# Altium PCB PIPOCPUG_2006.PCBDOC (part 1 of 6)
Units mil, origin at the board's own origin, x right, y up, seen from the top; angles counter-clockwise.
Board outline 8500 x 4525 mil, 2 copper layers (Top Layer, Top, Bottom Layer, Bottom); 346 components, 259 nets, 1117 pads, 618 vias.
Unrouted connection lines stored in the file: 782.
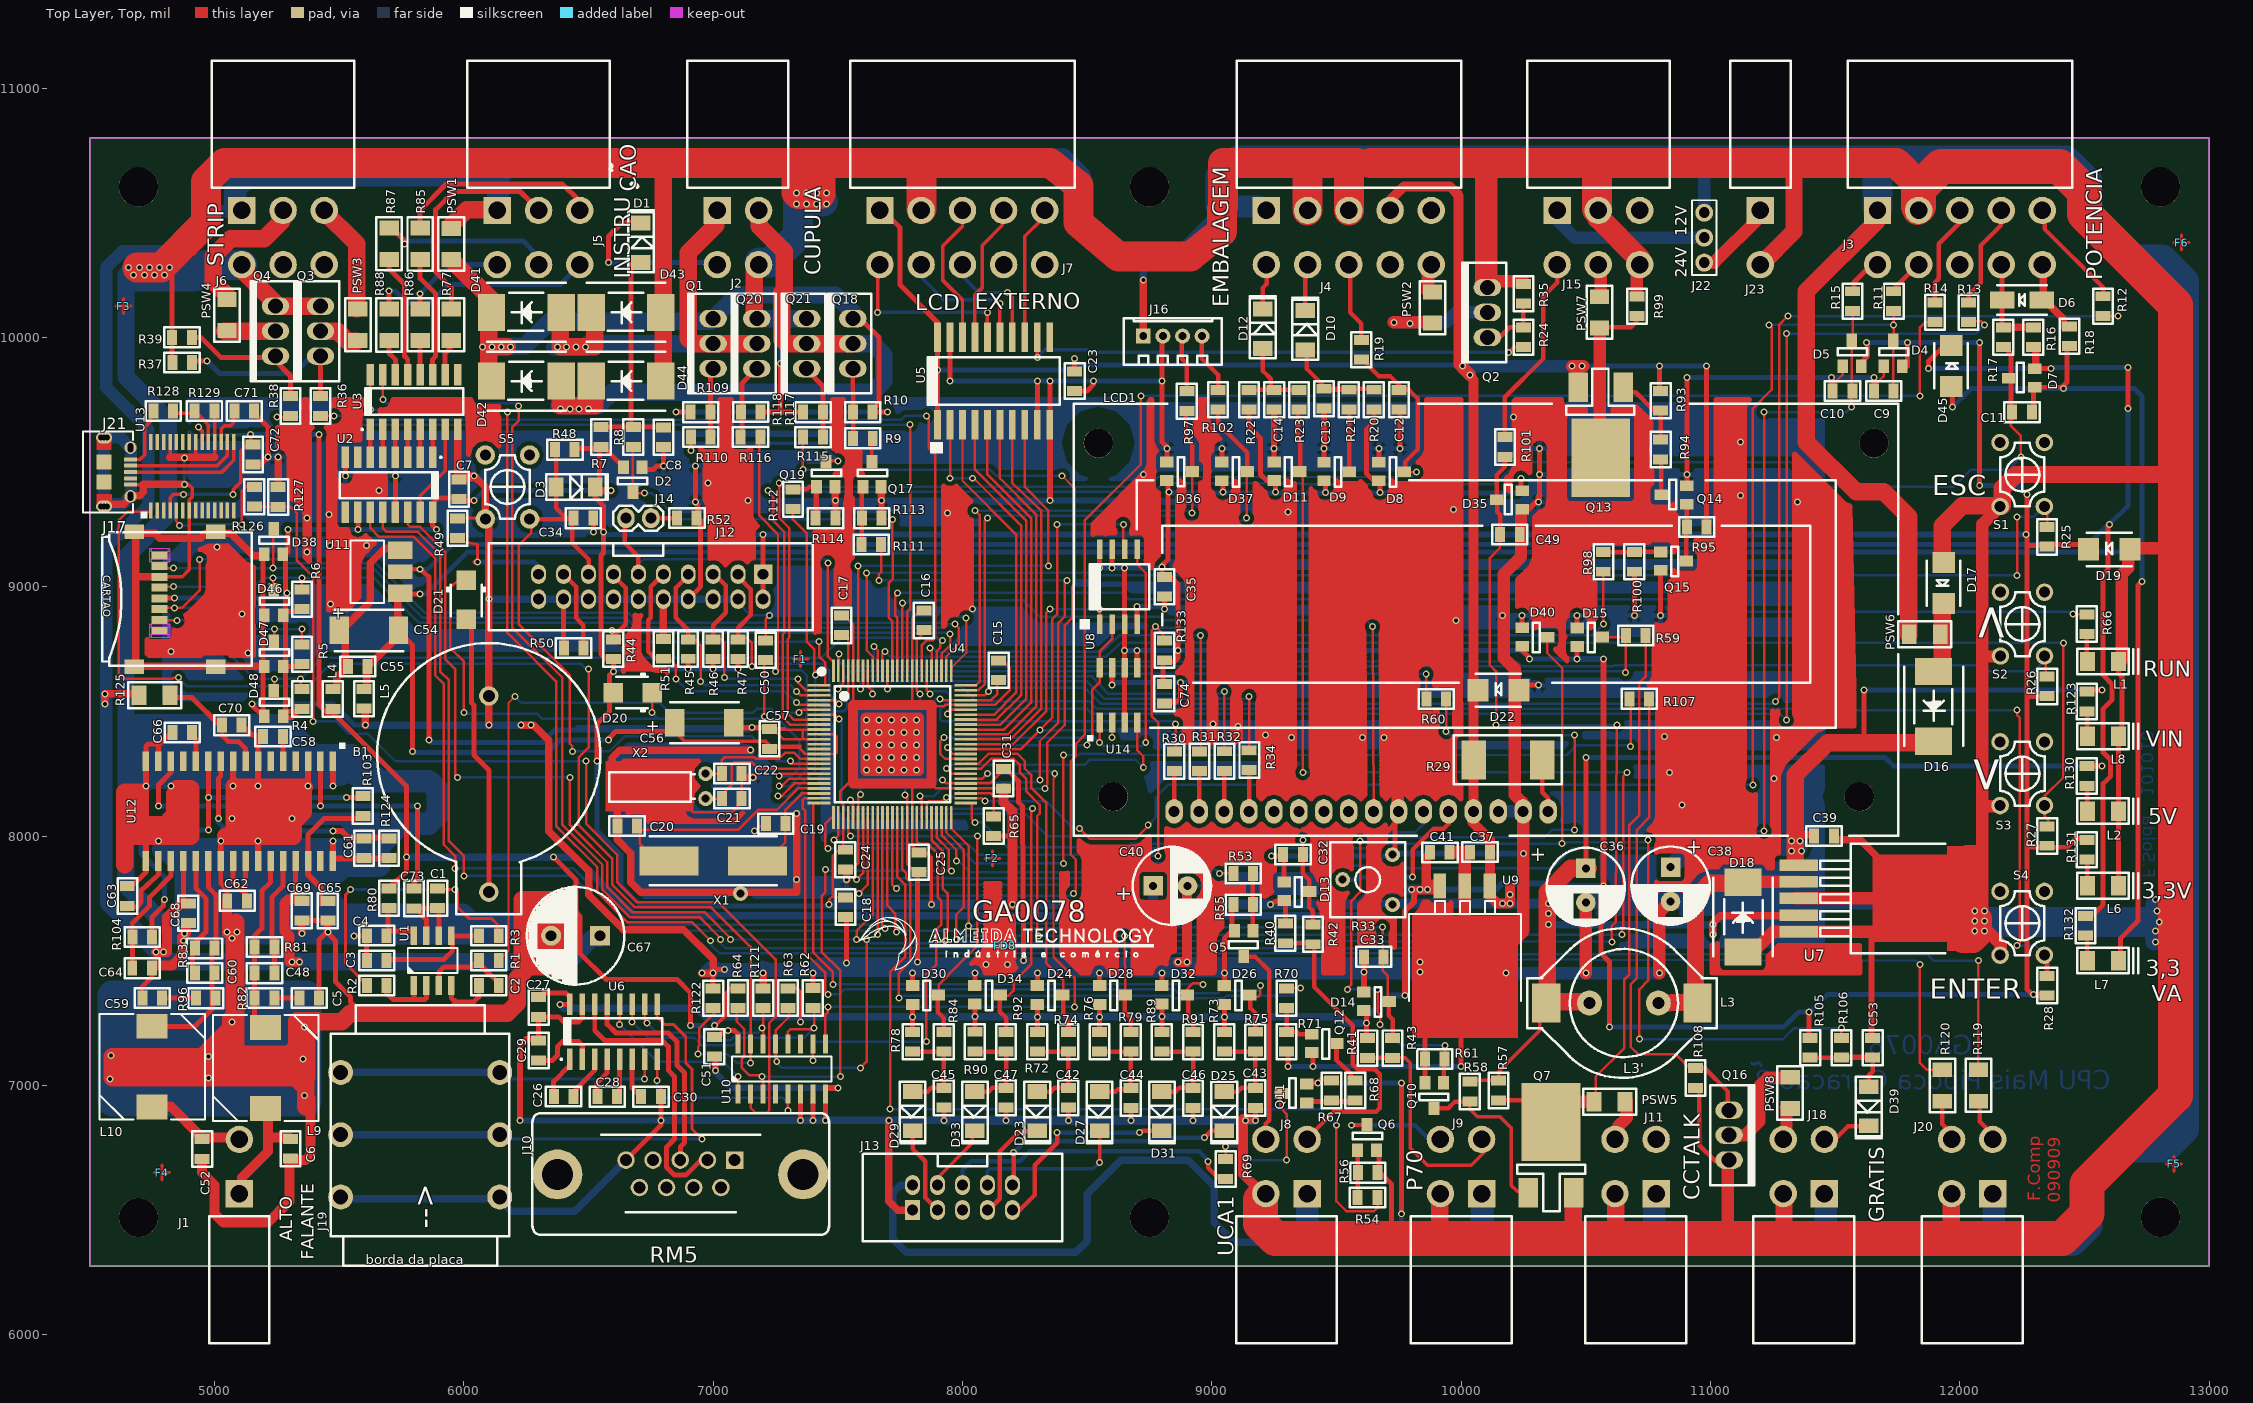
[diagram p0: Top Layer, Top view]
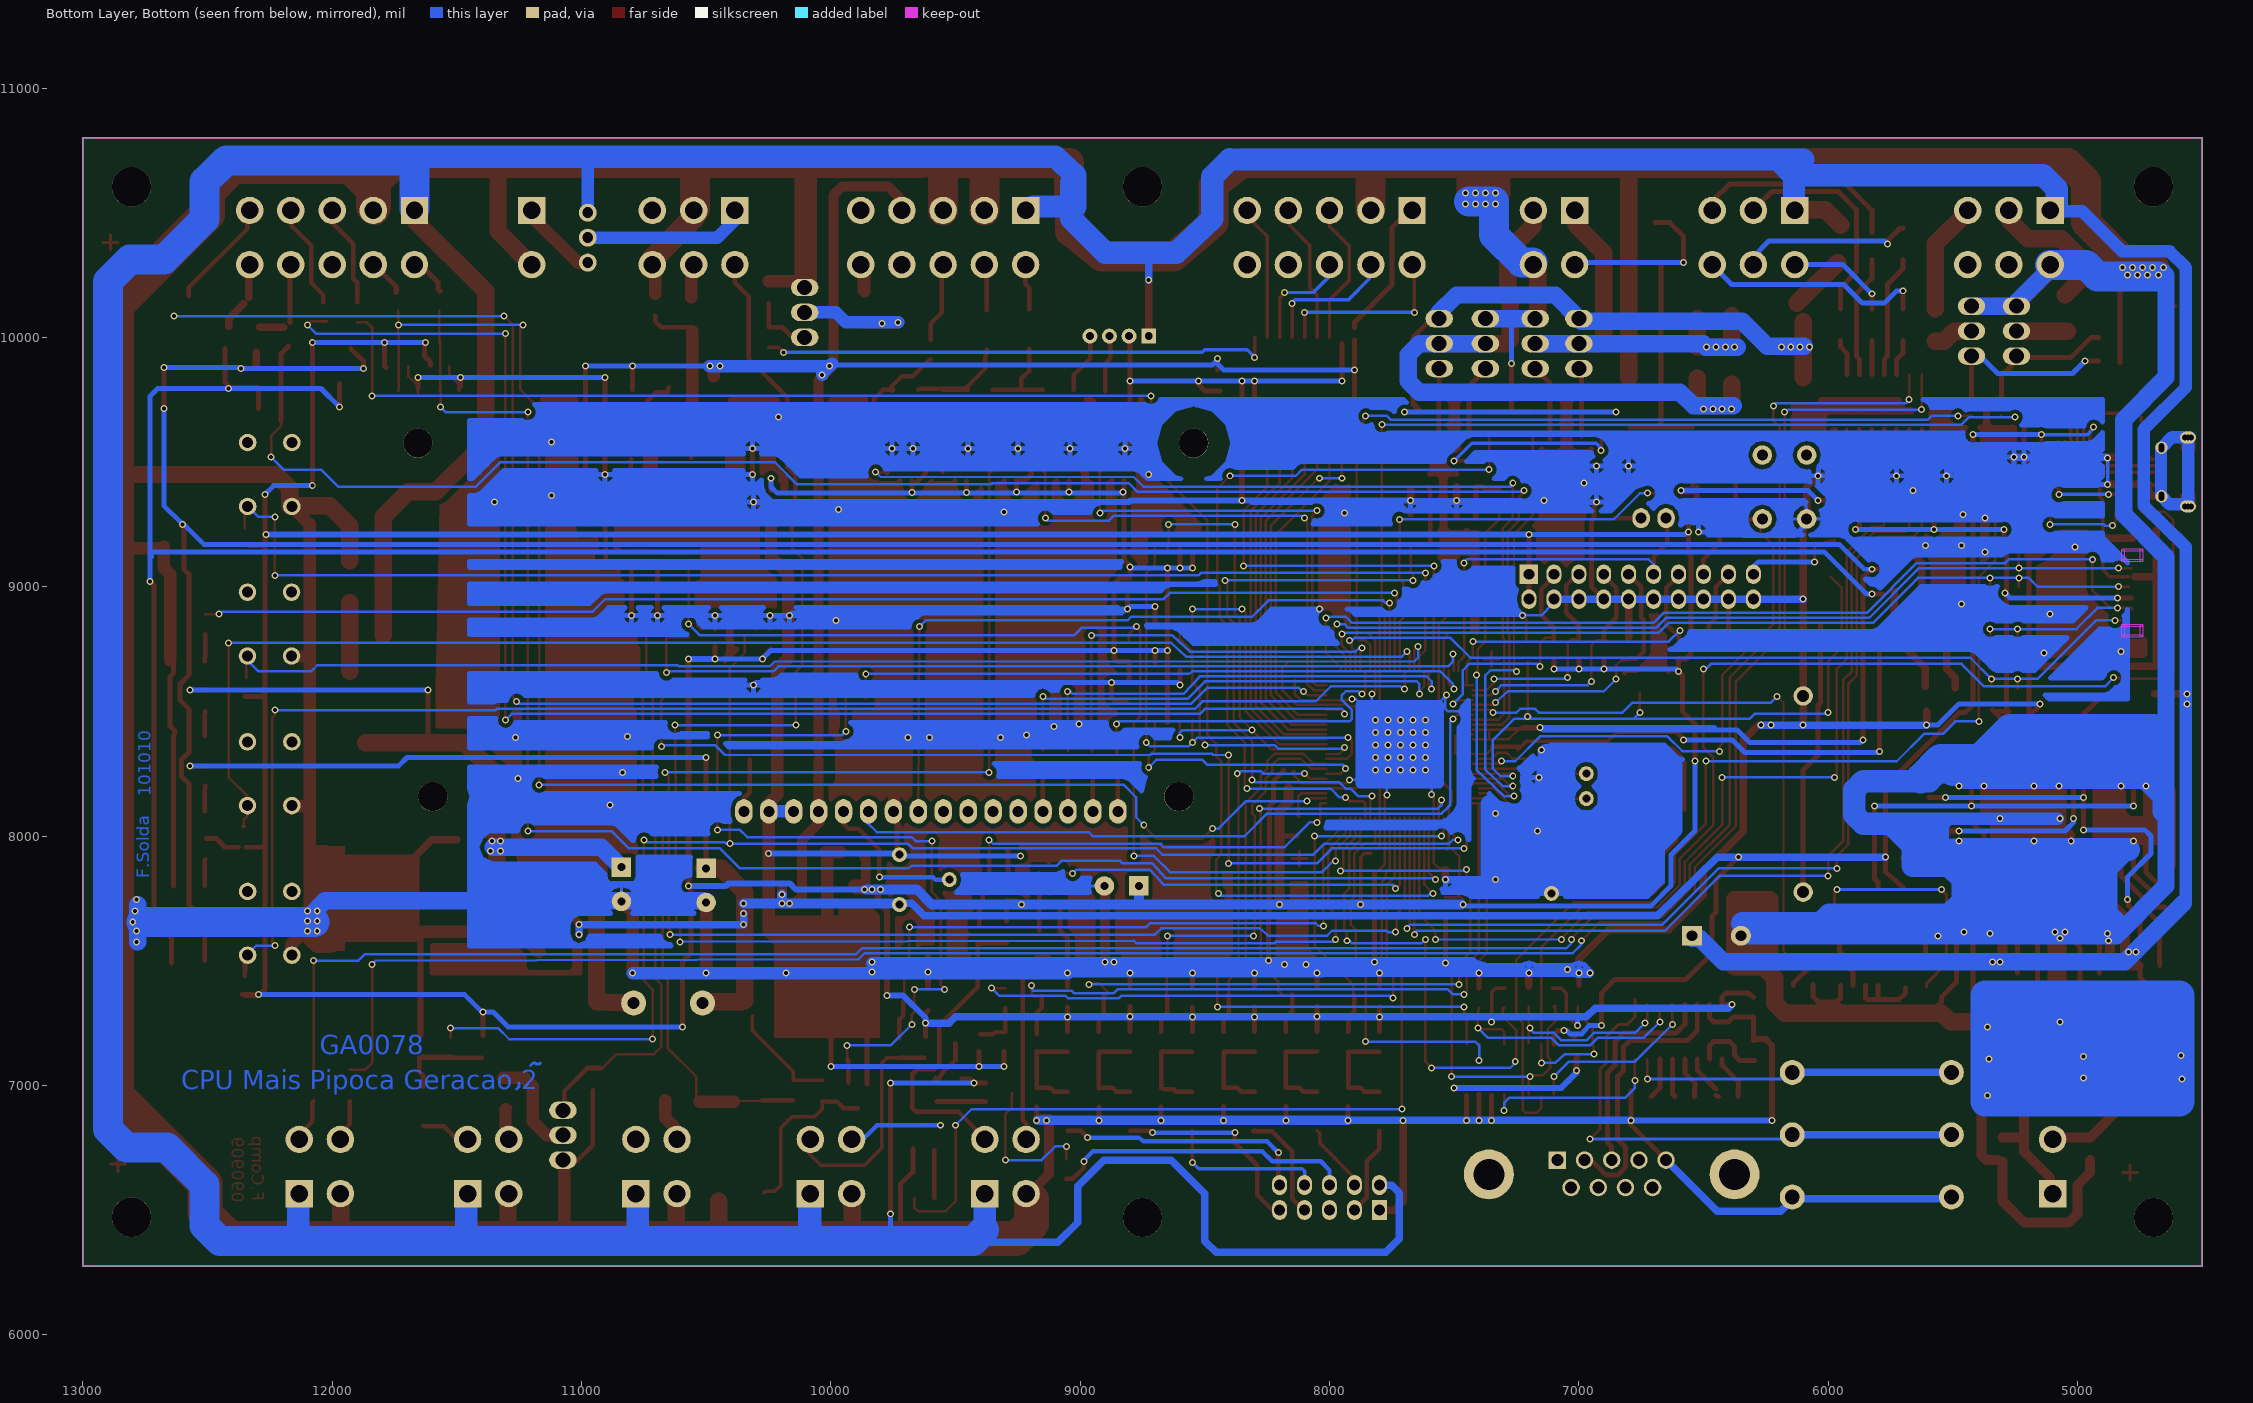
[diagram p1: Bottom Layer, Bottom view, seen from below]

## Layer stack, top to bottom
Top Layer, Top: signal copper 1.4
Dielectric: dielectric 12.6, FR-4, Dk 4.8
Bottom Layer, Bottom: signal copper 1.4

## Board outline
13000,6275 13000,10800 4500,10800 4500,6275

## Design rules (kind name [scope] priority, off if disabled: settings)
Clearance "Clearance_Top Layer, Top_PadToPad" [ExistsOnLayer('Top Layer, Top') And IsPad vs ExistsOnLayer('Top Layer, Top') And IsPad] p1: gap=12
Clearance "Clearance_Top Layer, Top_PadToLine" [ExistsOnLayer('Top Layer, Top') And IsPad vs ExistsOnLayer('Top Layer, Top') And IsWire] p2: gap=12
Clearance "Clearance_Top Layer, Top_LineToLine" [ExistsOnLayer('Top Layer, Top') And IsWire vs ExistsOnLayer('Top Layer, Top') And IsWire] p3: gap=12
Clearance "Clearance_Top Layer, Top_ViaToPad" [ExistsOnLayer('Top Layer, Top') And IsVia vs ExistsOnLayer('Top Layer, Top') And IsPad] p4: gap=12
Clearance "Clearance_Top Layer, Top_ViaToLine" [ExistsOnLayer('Top Layer, Top') And IsVia vs ExistsOnLayer('Top Layer, Top') And IsWire] p5: gap=12
Clearance "Clearance_Top Layer, Top_ViaToVia" [ExistsOnLayer('Top Layer, Top') And IsVia vs ExistsOnLayer('Top Layer, Top') And IsVia] p6: gap=12
Clearance "Clearance_Bottom Layer, Bottom_PadToPad" [ExistsOnLayer('Bottom Layer, Bottom') And IsPad vs ExistsOnLayer('Bottom Layer, Bottom') And IsPad] p7: gap=12
Clearance "Clearance_Bottom Layer, Bottom_PadToLine" [ExistsOnLayer('Bottom Layer, Bottom') And IsPad vs ExistsOnLayer('Bottom Layer, Bottom') And IsWire] p8: gap=12
Clearance "Clearance_Bottom Layer, Bottom_LineToLine" [ExistsOnLayer('Bottom Layer, Bottom') And IsWire vs ExistsOnLayer('Bottom Layer, Bottom') And IsWire] p9: gap=12
Clearance "Clearance_Bottom Layer, Bottom_ViaToPad" [ExistsOnLayer('Bottom Layer, Bottom') And IsVia vs ExistsOnLayer('Bottom Layer, Bottom') And IsPad] p10: gap=12
Clearance "Clearance_Bottom Layer, Bottom_ViaToLine" [ExistsOnLayer('Bottom Layer, Bottom') And IsVia vs ExistsOnLayer('Bottom Layer, Bottom') And IsWire] p11: gap=12
Clearance "Clearance_Bottom Layer, Bottom_ViaToVia" [ExistsOnLayer('Bottom Layer, Bottom') And IsVia vs ExistsOnLayer('Bottom Layer, Bottom') And IsVia] p12: gap=12
Clearance Clearance_Design_HoleToHole [(IsVia Or IsThruPin) vs (IsVia Or IsThruPin)] p13: gap=13
Clearance [All] p14: gap=12
PlaneClearance [All] p1: clearance=10
PolygonConnect [All] p1: connectstyle=Relief reliefconductorwidth=10 reliefentries=4 polygonreliefangle="90 Angle"
RoutingVias [All] p1: holewidth=28 width=50 viastyle="Through Hole" minholewidth=28 minwidth=50 maxholewidth=28 maxwidth=50
SilkscreenOverComponentPads [All] p1: minsilkscreentomaskgap=10
SolderMaskExpansion [All] p1: expansion=4
Width [All] p1: maxlimit=10 minlimit=10 preferedwidth=10
26 further rules are at their usual default settings.

## Components (designator, comment, footprint, x,y, rotation, side; value= is the part's Value field where it differs from the comment)
B1 "" "SUPORTE PILHA C" 6100,7775 r0 top
C1 "100nF/50V-0805" "0805-REVISADO O"#1 5895,7750 r0 top
C2 "100nF/50V-0805" "0805-REVISADO O"#2 6100,7400 r0 top
C3 "100nF/50V-0805" "0805-REVISADO O"#2 5650,7500 r0 top
C4 "100nF/50V-0805" "0805-REVISADO O"#2 5650,7600 r0 top
C5 "100nF/50V-0805" "0805-REVISADO O"#3 5380,7350 r0 top
C6 "100nF/50V-0805" "0805-REVISADO O"#1 5305,6745 r0 top
C7 "100nF/50V-0805" "0805-REVISADO O"#4 5980,9390 r0 top
C8 "100nF/50V-0805" "0805-REVISADO O"#5 6800,9600 r0 top
C9 "100nF/50V-0805" "0805-REVISADO O"#6 11695,9785 r0 top
C10 "22pF/50V-0805" "0805-REVISADO O"#3 11530,9785 r0 top
C11 "100nF/50V-0805" "0805-REVISADO O"#3 12250,9700 r0 top
C12 "100nF/50V-0805" "0805-REVISADO O"#5 9750,9750 r0 top
C13 "100nF/50V-0805" "0805-REVISADO O"#5 9450,9755 r0 top
C14 "100nF/50V-0805" "0805-REVISADO O"#5 9250,9750 r0 top
C15 "100nF/50V-0805" "0805-REVISADO O"#5 8145,8665 r0 top
C16 "100nF/50V-0805" "0805-REVISADO O"#1 7845,8865 r0 top
C17 "100nF/50V-0805" "0805-REVISADO O"#1 7515,8845 r0 top
C18 "100nF/50V-0805" "0805-REVISADO O"#7 7530,7715 r0 top
C19 "22pF/50V-0805" "0805-REVISADO O"#2 7250,8050 r0 top
C20 "22pF/50V-0805" "0805-REVISADO O"#8 6655,8040 r0 top
C21 "22pF/50V-0805" "0805-REVISADO O"#3 7075,8150 r0 top
C22 "22pF/50V-0805" "0805-REVISADO O"#3 7075,8250 r0 top
C23 "100nF/50V-0805" "0805-REVISADO O"#5 8450,9825 r0 top
C24 "100nF/50V-0805" "0805-REVISADO O"#1 7530,7905 r0 top
C25 "100nF/50V-0805" "0805-REVISADO O"#5 7825,7895 r0 top
C26 "100nF/50V-0805" "0805-REVISADO O"#9 6400,6955 r0 top
C27 "100nF/50V-0805" "0805-REVISADO O"#5 6300,7315 r0 top
C28 "100nF/50V-0805" "0805-REVISADO O"#6 6575,6955 r0 top
C29 "100nF/50V-0805" "0805-REVISADO O"#10 6300,7140 r0 top
C30 "100nF/50V-0805" "0805-REVISADO O"#6 6750,6955 r0 top
C31 "100nF/50V-0805" "0805-REVISADO O"#11 8165,8230 r0 top
C32 "100nF/50V-0805" "0805-REVISADO O"#2 9325,7925 r0 top
C33 "100nF/50V-0805" "0805-REVISADO O"#12 9650,7515 r0 top
C34 "100nF/50V-0805" "0805-REVISADO O"#3 6480,9275 r0 top
C35 "100nF/50V-0805" "0805-REVISADO O"#5 8810,9000 r0 top
C36 "100uF/35V" "CAP POL 8X12MM"#1 10500,7870 r0 top
C37 "100nF/50V-0805" "0805-REVISADO O"#2 10075,7935 r0 top
C38 "100uF/35V" "CAP POL 8X12MM"#1 10840,7875 r0 top
C39 "100nF/50V-0805" "0805-REVISADO O"#6 11455,8000 r0 top
C40 "100uF/35V" "CAP POL 8X12MM"#2 8765,7800 r0 top
C41 "100nF/50V-0805" "0805-REVISADO O"#9 9915,7935 r0 top
C42 "100nF/50V-0805" "0805-REVISADO O"#1 8425,6950 r0 top
C43 "100nF/50V-0805" "0805-REVISADO O"#5 9175,6950 r0 top
C44 "100nF/50V-0805" "0805-REVISADO O"#5 8675,6950 r0 top
C45 "100nF/50V-0805" "0805-REVISADO O"#1 7925,6950 r0 top
C46 "100nF/50V-0805" "0805-REVISADO O"#5 8925,6950 r0 top
C47 "100nF/50V-0805" "0805-REVISADO O"#1 8175,6950 r0 top
C48 "100nF/50V-0805" "0805-REVISADO O"#2 5200,7450 r0 top
C49 "22pF-0805-NPO" "0805-REVISADO O"#6 10195,9210 r0 top
C50 "100nF/50V-0805" "0805-REVISADO O"#4 7210,8745 r0 top
C51 "100nF/50V-0805" "0805-REVISADO O"#5 7005,7155 r0 top
C52 "100nF/50V-0805" "0805-REVISADO O"#10 4950,6745 r0 top
C53 "100nF/50V-0805" "0805-REVISADO O"#4 11650,7150 r0 top
C54 "10uF/35V-tantalo" "TANTALO VISHAY"#1 5620,8825 r0 top
C55 "100nF/50V-0805" "0805-REVISADO O"#3 5575,8680 r0 top
C56 "10uF/35V-tantalo" "TANTALO VISHAY"#2 6965,8455 r0 top
C57 "100nF/50V-0805" "0805-REVISADO O"#5 7225,8390 r0 top
C58 "100nF/50V-0805" "0805-REVISADO O"#3 5235,8400 r0 top
C59 "100nF/50V-0805" "0805-REVISADO O"#2 4750,7350 r0 top
C60 "100nF/50V-0805" "0805-REVISADO O"#2 4960,7450 r0 top
C61 "100nF/50V-0805" "0805-REVISADO O"#1 5600,7950 r0 top
C62 "100nF/50V-0805" "0805-REVISADO O"#2 5090,7740 r0 top
C63 "100nF/50V-0805" "0805-REVISADO O"#10 4650,7760 r0 top
C64 "100nF/50V-0805" "0805-REVISADO O"#3 4710,7470 r0 top
C65 "100nF/50V-0805" "0805-REVISADO O"#1 5455,7700 r0 top
C66 "100nF/50V-0805" "0805-REVISADO O"#2 4870,8415 r0 top
C67 "470uF/50V" "CAP 10X5" 6546,7600 r0 top
C68 "100nF/50V-0805" "0805-REVISADO O"#1 4895,7690 r0 top
C69 "100nF/50V-0805" "0805-REVISADO O"#1 5350,7700 r0 top
C70 "100nF/50V-0805" "0805-REVISADO O"#3 5070,8445 r0 top
C71 "100nF/50V-0805" "0805-REVISADO O"#3 5120,9705 r0 top
C72 "100nF/50V-0805" "0805-REVISADO O"#1 5155,9530 r0 top
C73 "100nF/50V-0805" "0805-REVISADO O"#10 5800,7750 r0 top
C74 "100nF/50V-0805" "0805-REVISADO O"#1 8810,8570 r0 top
D1 "1N5819-SOD80" MINIMLEF/SOD80#1 6710,10300 r0 top
D2 "BAT54ST" "SOT23 - REVISAD"#1 6715,9480 r0 top
D3 "1N4148-SOD80" MINIMLEF/SOD80#2 6370,9400 r0 top
D4 "BAT54ST" "SOT23 - REVISAD"#2 11695,9885 r0 top
D5 "BAT54ST" "SOT23 - REVISAD"#3 11530,9885 r0 top
D6 "SMBJ5.0A" "SMA DIODES" 12250,10150 r0 top
D7 "BAT54ST" "SOT23 - REVISAD"#4 12300,9800 r0 top
D8 "BAT54ST" "SOT23 - REVISAD"#5 9670,9500 r0 top
D9 "BAT54ST" "SOT23 - REVISAD"#5 9450,9500 r0 top
D10 "1N5819-SOD80" MINIMLEF/SOD80#1 9375,9950 r0 top
D11 "BAT54ST" "SOT23 - REVISAD"#6 9250,9500 r0 top
D12 "1N5819-SOD80" MINIMLEF/SOD80#1 9205,9955 r0 top
D13 "BAT54ST" "SOT23 - REVISAD"#6 9290,7815 r0 top
D14 "BAT54ST" "SOT23 - REVISAD"#7 9610,7375 r0 top
D15 "BAT54ST" "SOT23 - REVISAD"#6 10465,8835 r0 top
D16 "MBRS360T" DO-214AB#1 11895,8520 r0 top
D17 "SMBJ30.0A" DO-214AA#1 11935,9015 r0 top
D18 "MBRS360T" DO-214AB#2 11130,7675 r0 top
D19 "SMBJ3.3A" DO-214AA#2 12600,9150 r0 top
D20 "" SMA#1 6675,8575 r0 top
D21 "" SMA#2 6010,8945 r0 top
D22 "SMBJ5.0A" DO-214AA#2 10150,8585 r0 top
D23 "1N5819-SOD80" MINIMLEF/SOD80#3 8300,6975 r0 top
D24 "BAT54ST" "SOT23 - REVISAD"#7 8300,7400 r0 top
D25 "1N5819-SOD80" MINIMLEF/SOD80#3 9050,6975 r0 top
D26 "BAT54ST" "SOT23 - REVISAD"#7 9050,7400 r0 top
D27 "1N5819-SOD80" MINIMLEF/SOD80#3 8550,6975 r0 top
D28 "BAT54ST" "SOT23 - REVISAD"#7 8550,7400 r0 top
D29 "1N5819-SOD80" MINIMLEF/SOD80#3 7800,6975 r0 top
D30 "BAT54ST" "SOT23 - REVISAD"#7 7800,7400 r0 top
D31 "1N5819-SOD80" MINIMLEF/SOD80#3 8800,6975 r0 top
D32 "BAT54ST" "SOT23 - REVISAD"#6 8800,7400 r0 top
D33 "1N5819-SOD80" MINIMLEF/SOD80#3 8050,6975 r0 top
D34 "BAT54ST" "SOT23 - REVISAD"#6 8050,7400 r0 top
D35 "BAT54ST" "SOT23 - REVISAD"#8 10245,9310 r0 top
D36 "BAT54ST" "SOT23 - REVISAD"#6 8820,9500 r0 top
D37 "BAT54ST" "SOT23 - REVISAD"#7 9040,9500 r0 top
D38 "BAT54ST" "SOT23 - REVISAD"#9 5200,9130 r0 top
D39 "1N5819-SOD80" MINIMLEF/SOD80#4 11635,6995 r0 top
D40 "BAT54ST" "SOT23 - REVISAD"#10 10245,8835 r0 top
D41 "MBRS360T" DO-214AB#3 6250,10100 r0 top
D42 "MBRS360T" DO-214AB#3 6250,9825 r0 top
D43 "MBRS360T" DO-214AB#3 6650,10100 r0 top
D44 "MBRS360T" DO-214AB#3 6650,9825 r0 top
D45 "SMBJ3.3A" DO-214AA#3 11965,9885 r0 top
D46 "BC846L" "SOT23 - REVISAD"#11 5200,8885 r0 top
D47 "BC846L" "SOT23 - REVISAD"#11 5200,8680 r0 top
D48 "BC846L" "SOT23 - REVISAD"#11 5200,8480 r0 top
F1 "" FIDUCIAL' 7350,8710 r0 top
F2 "" FIDUCIAL' 8120,7910 r0 top
F3 "" FIDUCIAL' 4635,10125 r0 top
F4 "" FIDUCIAL' 4790,6650 r0 top
F5 "" FIDUCIAL' 12860,6685 r0 top
F6 "" FIDUCIAL' 12890,10380 r0 top
FD8 "" ALMEIDA 8170,7560 r0 top
J1 "MFPL-02" MFPL-02#1 5100,6675 r0 top
J2 "MFPL-04" MFPL-04#1 7100,10400 r0 top
J3 "MFPL-10" MFPL-10#1 12000,10400 r0 top
J4 "MFPL-10" MFPL-10#2 9550,10400 r0 top
J5 "MFPL-06" MFPL-06#1 6300,10400 r0 top
J6 "MFPL-06" MFPL-06#1 5275,10400 r0 top
J7 "MFPL-10" MFPL-10#2 8000,10400 r0 top
J8 "MFPL-04" MFPL-04#2 9300,6675 r0 top
J9 "MFPL-04" MFPL-04#2 10000,6675 r0 top
J10 "DPBCF-09" "DB9-FÊMEA MONTA_DB9-FÊMEA_MONTAGEM_EM_PCI_180(Primary)" 6650,6700 r0 top
J11 "MFPL-04" MFPL-04#2 10700,6675 r0 top
J12 "IDCSC-20" IDCSC-20 7200,9050 r0 top
J13 "IDCSC-10" IDCSC-10 8000,6550 r0 top
J14 "BMO-02-2E" JUMPER100 6750,9275 r0 top
J15 "MFPL-06" MFPL-06#2 10550,10400 r0 top
J16 "PCMC2-4" PHMC4-04 8725,10005 r0 top
J17 "" SD_47219_MOLEX_SD_47219_MOLEX(Primary) 4850,8950 r0 top
J18 "MFPL-04" MFPL-04#2 11375,6675 r0 top
J19 "" TOMADA_NMJ6HCD2_TOMADA_NMJ6HCD2(Primary) 5825,6395 r0 top
J20 "MFPL-04" MFPL-04#2 12050,6675 r0 top
J21 "" USB_B_FCI10118'_USB_B_FCI10118'(Primary) 4557,9460 r0 top
J22 "" BARRA_3P 10975,10400 r0 top
J23 "MFPL-02" MFPL-02#2 11200,10400 r0 top
L1 "" "LED 1206" 12575,8700 r0 top
L2 "" "LED 1206" 12575,8100 r0 top
L3 "1mH-CNF15-26 AWG" "INDUTOR 47MH" 10515,7330 r0 top
L3' "1mH-CNF15-26 AWG" "INDUTOR B82479A" 10645,7330 r0 top
L4 "FBMJ2125HS420-TV" "0805-REVISADO O"#5 5475,8550 r0 top
L5 "FBMJ2125HS420-TV" "0805-REVISADO O"#1 5600,8550 r0 top
L6 "" "LED 1206" 12575,7800 r0 top
L7 "" "LED 1206" 12575,7500 r0 top
L8 "" "LED 1206" 12575,8400 r0 top
L9 "" IND_MBH10145C 5205,7070 r0 top
L10 "" IND_MBH10145C 4750,7075 r0 top
LCD1 "NAO MONTAR" WH1602B_DS_WH1602B_DS(Primary) 10100,8930 r0 top
PSW1 "MF-NSMF200-2" "1206-REVISADO O"#1 5950,10375 r0 top
PSW2 "MF-NSMF200-2" "1206-REVISADO O"#1 9885,10120 r0 top
PSW3 "0ZCJ0025AF2E" "1206-REVISADO O"#2 5575,10050 r0 top
PSW4 "0ZCJ0025AF2E" "1206-REVISADO O"#1 5050,10090 r0 top
PSW5 "0ZCJ0025AF2E" "1206-REVISADO O"#3 10595,6935 r0 top
PSW6 "NANOSMDC050F/13.2-2" "1206-REVISADO O"#4 11860,8810 r0 top
PSW7 "0ZCJ0025AF2E" "1206-REVISADO O"#5 10555,10100 r0 top
PSW8 "0ZCJ0025AF2E" "1206-REVISADO O"#6 11320,6970 r0 top
Q1 "IRF9540" "TO220-3 EM PÉ"#1 7000,9875 r0 top
Q2 "IRLZ44N-TO220" "TO220-3 EM PÉ"#1 10105,10000 r0 top
Q3 "IRLZ44N-TO220" "TO220-3 EM PÉ"#1 5425,9925 r0 top
Q4 "IRLZ44N-TO220" "TO220-3 EM PÉ"#1 5245,9925 r0 top
Q5 "BC846L" "SOT23 - REVISAD"#1 9165,7620 r0 top
Q6 "BC846L" "SOT23 - REVISAD"#12 9585,6740 r0 top
Q7 "MJD31" "DPAK REVISADO O"#1 10270,6570 r0 top
Q10 "BC846L" "SOT23 - REVISAD"#13 9930,7010 r0 top
Q11 "BC856L" "SOT23 - REVISAD"#14 9380,6930 r0 top
Q12 "BC846L" "SOT23 - REVISAD"#6 9400,7205 r0 top
Q13 "TIP42A" "DPAK REVISADO O"#2 10650,9800 r0 top
Q14 "BC846L" "SOT23 - REVISAD"#8 10905,9330 r0 top
Q15 "BC846L" "SOT23 - REVISAD"#6 10800,9140 r0 top
Q16 "IRLZ44N-TO220" "TO220-3 EM PÉ"#2 11075,6900 r0 top
Q17 "BC846L" "SOT23 - REVISAD"#15 7600,9400 r0 top
Q18 "IRF9540" "TO220-3 EM PÉ"#1 7560,9875 r0 top
Q19 "BC846L" "SOT23 - REVISAD"#15 7415,9400 r0 top
Q20 "IRLZ44N-TO220" "TO220-3 EM PÉ"#1 7175,9875 r0 top
Q21 "IRLZ44N-TO220" "TO220-3 EM PÉ"#1 7375,9875 r0 top
R1 "0R-0805" "0805-REVISADO O"#6 6100,7500 r0 top
R2 "1K-0805-5%" "0805-REVISADO O"#6 5650,7400 r0 top
R3 "100K-0805-5%" "0805-REVISADO O"#6 6100,7600 r0 top
R4 "1K-0805-5%" "0805-REVISADO O"#5 5350,8550 r0 top
R5 "1K-0805-5%" "0805-REVISADO O"#5 5350,8730 r0 top
R6 "1K-0805-5%" "0805-REVISADO O"#5 5350,8950 r0 top
R7 "10K-0805-5%" "0805-REVISADO O"#4 6550,9600 r0 top
R8 "1K-0805-5%" "0805-REVISADO O"#4 6680,9600 r0 top
R9 "100R-0805-5%" "0805-REVISADO O"#6 7600,9595 r0 top
R10 "100K-0805-5%" "0805-REVISADO O"#12 7600,9700 r0 top
R11 "1K-0805-5%" "0805-REVISADO O"#4 11735,10145 r0 top
R12 "100R-0805-5%" "0805-REVISADO O"#4 12575,10125 r0 top
R13 "100R-0805-5%" "0805-REVISADO O"#1 12035,10100 r0 top
R14 "100R-0805-5%" "0805-REVISADO O"#1 11900,10100 r0 top
R15 "1K-0805-5%" "0805-REVISADO O"#4 11570,10145 r0 top
R16 "499R-0805-1%" "0805-REVISADO O"#4 12295,10000 r0 top
R17 "1K-0805-5%" "0805-REVISADO O"#4 12175,10000 r0 top
R18 "499R-0805-1%" "0805-REVISADO O"#5 12440,10005 r0 top
R19 "1K-0805-5%" "0805-REVISADO O"#4 9600,9950 r0 top
R20 "10K-0805-5%" "0805-REVISADO O"#4 9650,9750 r0 top
R21 "1K-0805-5%" "0805-REVISADO O"#4 9550,9750 r0 top
R22 "10K-0805-5%" "0805-REVISADO O"#10 9150,9750 r0 top
R23 "1K-0805-5%" "0805-REVISADO O"#10 9350,9750 r0 top
R24 "100R-0805-5%" "0805-REVISADO O"#4 10250,10000 r0 top
R25 "56K-0805-5%" "0805-REVISADO O"#7 12350,9200 r0 top
R26 "56K-0805-5%" "0805-REVISADO O"#7 12350,8600 r0 top
R27 "56K-0805-5%" "0805-REVISADO O"#7 12350,8000 r0 top
R28 "56K-0805-5%" "0805-REVISADO O"#7 12350,7400 r0 top
R29 "5R6-2512-5%" "2512 - REVISADO" 10325,8305 r0 top
R30 "100R-0805-5%" "0805-REVISADO O"#5 8850,8300 r0 top
R31 "100R-0805-5%" "0805-REVISADO O"#5 8950,8300 r0 top
R32 "100R-0805-5%" "0805-REVISADO O"#1 9050,8300 r0 top
R33 "TRIMPOT 10K-BOURNS 3386" "TRIMPOT 3386" 9725,7725 r0 top
R34 "100R-0805-5%" "0805-REVISADO O"#5 9150,8305 r0 top
R35 "100K-0805-5%" "0805-REVISADO O"#4 10250,10175 r0 top
R36 "100R-0805-5%" "0805-REVISADO O"#5 5425,9725 r0 top
R37 "100K-0805-5%" "0805-REVISADO O"#6 4870,9900 r0 top
R38 "100R-0805-5%" "0805-REVISADO O"#5 5305,9725 r0 top
R39 "100K-0805-5%" "0805-REVISADO O"#3 4870,10000 r0 top
R40 "10K-0805-5%" "0805-REVISADO O"#5 9295,7610 r0 top
R41 "10K-0805-5%" "0805-REVISADO O"#5 9625,7150 r0 top
R42 "1K-0805-5%" "0805-REVISADO O"#4 9405,7605 r0 top
R43 "1K-0805-5%" "0805-REVISADO O"#5 9725,7150 r0 top
R44 "10K-0805-5%" "0805-REVISADO O"#5 6600,8750 r0 top
R45 "10K-0805-5%" "0805-REVISADO O"#7 6900,8750 r0 top
R46 "10K-0805-5%" "0805-REVISADO O"#5 7000,8750 r0 top
R47 "10K-0805-5%" "0805-REVISADO O"#5 7100,8750 r0 top
R48 "10K-0805-5%" "0805-REVISADO O"#12 6405,9550 r0 top
R49 "10K-0805-5%" "0805-REVISADO O"#5 5975,9235 r0 top
R50 "10K-0805-5%" "0805-REVISADO O"#9 6440,8755 r0 top
R51 "10K-0805-5%" "0805-REVISADO O"#1 6800,8750 r0 top
R52 "10K-0805-5%" "0805-REVISADO O"#12 6895,9275 r0 top
R53 "1K-0805-5%" "0805-REVISADO O"#6 9125,7850 r0 top
R54 "1K-0805-5%" "0805-REVISADO O"#12 9625,6550 r0 top
R55 "10K-0805-5%" "0805-REVISADO O"#6 9125,7725 r0 top
R56 "10K-0805-5%" "0805-REVISADO O"#6 9625,6650 r0 top
R57 "10K-0805-5%" "0805-REVISADO O"#5 10150,6980 r0 top
R58 "10K-0805-5%" "0805-REVISADO O"#1 10035,6975 r0 top
R59 "1K-0805-5%" "0805-REVISADO O"#6 10700,8805 r0 top
R60 "1K-0805-5%" "0805-REVISADO O"#6 9900,8550 r0 top
R61 "10K-0805-5%" "0805-REVISADO O"#12 9895,7105 r0 top
R62 "" "0805-REVISADO O"#4 7400,7350 r0 top
R63 "10K-0805-5%" "0805-REVISADO O"#7 7300,7350 r0 top
R64 "10K-0805-5%" "0805-REVISADO O"#7 7100,7350 r0 top
R65 "100nF/50V-0805" "0805-REVISADO O"#7 8125,8040 r0 top
R66 "" "0805-REVISADO O"#5 12510,8850 r0 top
R67 "10K-0805-5%" "0805-REVISADO O"#10 9480,6980 r0 top
R68 "1K-0805-5%" "0805-REVISADO O"#5 9575,6980 r0 top
R69 "100R-0805-5%" "0805-REVISADO O"#5 9055,6665 r0 top
R70 "1K-0805-5%" "0805-REVISADO O"#5 9300,7350 r0 top
R71 "10K-0805-5%" "0805-REVISADO O"#5 9300,7175 r0 top
R72 "10K-0805-5%" "0805-REVISADO O"#5 8300,7175 r0 top
R73 "10K-0805-5%" "0805-REVISADO O"#5 9050,7175 r0 top
R74 "1K-0805-5%" "0805-REVISADO O"#5 8425,7175 r0 top
R75 "1K-0805-5%" "0805-REVISADO O"#1 9175,7175 r0 top
R76 "10K-0805-5%" "0805-REVISADO O"#5 8550,7175 r0 top
R77 "10R-1206-5%" "1206-REVISADO O"#7 5950,10050 r0 top
R78 "10K-0805-5%" "0805-REVISADO O"#5 7800,7175 r0 top
R79 "1K-0805-5%" "0805-REVISADO O"#5 8675,7175 r0 top
R80 "100K-0805-5%" "0805-REVISADO O"#4 5700,7750 r0 top
R81 "1K-0805-5%" "0805-REVISADO O"#6 5200,7555 r0 top
R82 "1K-0805-5%" "0805-REVISADO O"#6 5200,7350 r0 top
R83 "10K-0805-5%" "0805-REVISADO O"#9 4960,7550 r0 top
R84 "1K-0805-5%" "0805-REVISADO O"#5 7925,7175 r0 top
R85 "10R-1206-5%" "1206-REVISADO O"#7 5825,10375 r0 top
R86 "10R-1206-5%" "1206-REVISADO O"#7 5825,10050 r0 top
R87 "10R-1206-5%" "1206-REVISADO O"#7 5700,10375 r0 top
R88 "10R-1206-5%" "1206-REVISADO O"#7 5700,10050 r0 top
R89 "10K-0805-5%" "0805-REVISADO O"#5 8800,7175 r0 top
R90 "10K-0805-5%" "0805-REVISADO O"#1 8050,7175 r0 top
R91 "1K-0805-5%" "0805-REVISADO O"#5 8925,7175 r0 top
R92 "1K-0805-5%" "0805-REVISADO O"#5 8175,7175 r0 top
R93 "10K-0805-5%" "0805-REVISADO O"#4 10800,9745 r0 top
R94 "1K-0805-5%" "0805-REVISADO O"#4 10800,9550 r0 top
R95 "10K-0805-5%" "0805-REVISADO O"#2 10945,9240 r0 top
R96 "10K-0805-5%" "0805-REVISADO O"#3 4965,7350 r0 top
R97 "100R-0805-5%" "0805-REVISADO O"#10 8900,9745 r0 top
R98 "10K-0805-5%" "0805-REVISADO O"#10 10570,9100 r0 top
R99 "100K-0805-5%" "0805-REVISADO O"#11 10705,10125 r0 top
R100 "10K-0805-5%" "0805-REVISADO O"#5 10695,9100 r0 top
R101 "1K-0805-5%" "0805-REVISADO O"#4 10175,9560 r0 top
R102 "100R-0805-5%" "0805-REVISADO O"#10 9025,9750 r0 top
R103 "10K-0805-5%" "0805-REVISADO O"#4 5595,8120 r0 top
R104 "1K-0805-5%" "0805-REVISADO O"#6 4710,7595 r0 top
R105 "10K-0805-5%" "0805-REVISADO O"#1 11400,7150 r0 top
R106 "1K-0805-5%" "0805-REVISADO O"#1 11525,7150 r0 top
R107 "100R-0805-5%" "0805-REVISADO O"#12 10715,8550 r0 top
R108 "100K-0805-5%" "0805-REVISADO O"#10 10940,7030 r0 top
R109 "100K-0805-5%" "0805-REVISADO O"#3 6950,9700 r0 top
R110 "100R-0805-5%" "0805-REVISADO O"#2 6950,9600 r0 top
R111 "1K-0805-5%" "0805-REVISADO O"#3 7635,9170 r0 top
R112 "1K-0805-5%" "0805-REVISADO O"#1 7320,9350 r0 top
R113 "10K-0805-5%" "0805-REVISADO O"#2 7635,9275 r0 top
R114 "10K-0805-5%" "0805-REVISADO O"#2 7450,9275 r0 top
R115 "100R-0805-5%" "0805-REVISADO O"#2 7400,9600 r0 top
R116 "100R-0805-5%" "0805-REVISADO O"#3 7150,9600 r0 top
R117 "100K-0805-5%" "0805-REVISADO O"#6 7400,9700 r0 top
R118 "100K-0805-5%" "0805-REVISADO O"#2 7150,9700 r0 top
R119 "10R-1206-5%" "1206-REVISADO O"#8 12075,7000 r0 top
R120 "10R-1206-5%" "1206-REVISADO O"#8 11930,7000 r0 top
R121 "" "0805-REVISADO O"#10 7200,7350 r0 top
R122 "10K-0805-5%" "0805-REVISADO O"#10 7000,7350 r0 top
R123 "" "0805-REVISADO O"#5 12510,8540 r0 top
R124 "10K-0805-5%" "0805-REVISADO O"#1 5700,7950 r0 top
R125 "1K-1206-5%" "1206-REVISADO O"#9 4760,8565 r0 top
R126 "1K-0805-5%" "0805-REVISADO O"#1 5160,9360 r0 top
R127 "1K-0805-5%" "0805-REVISADO O"#10 5255,9360 r0 top
R128 "1K-0805-5%" "0805-REVISADO O"#3 4795,9705 r0 top
R129 "1K-0805-5%" "0805-REVISADO O"#3 4960,9705 r0 top
R130 "1K-0805-5%" "0805-REVISADO O"#1 12510,8240 r0 top
R131 "1K-0805-5%" "0805-REVISADO O"#1 12510,7945 r0 top
R132 "1K-0805-5%" "0805-REVISADO O"#1 12505,7640 r0 top
R133 "100R-0805-5%" "0805-REVISADO O"#10 8810,8745 r0 top
S1 "" CHAVE_A06#1 12251,9450 r0 top
S2 "" CHAVE_A06#2 12251,8850 r0 top
S3 "" CHAVE_A06#3 12251,8250 r0 top
S4 "" CHAVE_A06#1 12251,7650 r0 top
S5 "A06-L12" CHAVE_A06#4 6175,9400 r0 top
U1 "" SO8#1 5800,7400 r0 top
U2 "74HC595D" "SOIC 16 PINOS"#1 5700,9425 r0 top
U3 "" "SOIC 16 PINOS"#2 5800,9725 r0 top
U4 "" "LQFP-100 PASTA" 7425,8605 r0 top
U5 "" SOIC-20 7900,9650 r0 top
U6 "MAX3232CSE" "SOIC 16 PINOS"#3 6600,7200 r0 top
U7 "" TO-263-5 11350,7750 r0 top
U8 "SST25VF032B" "SOIC LARGO ATME" 8550,8850 r0 top
U9 "" TO-263_3 10015,7800 r0 top
U10 "" SO16 7100,6965 r0 top
U11 "" SOT223 5620,9060 r0 top
U12 "" SOL32 5100,8100 r0 top
U13 "" SSOP28 4745,9305 r0 top
U14 "" SO8#2 8625,8565 r0 top
X1 "" HC49USM 7000,7900 r0 top
X2 "" "CRISTAL TH3" 6970,8150 r0 top

## Footprints (in the part's own frame and the unit in brackets; to place one, negate y for a bottom-side part, rotate by r counter-clockwise, add the part's x,y. Pads: shape width x height; smd on the part's side, far side on the other; paste and mask are expansions set on the pad)
"0805-REVISADO O"#1 [mil]
  rect 60x40 smd: 1(0,-39) 2(0,40)
  silkscreen extent -40,-70 39,71
"0805-REVISADO O"#2 [mil]
  rect 40x60 smd: 1(-39,0) 2(40,0)
  silkscreen extent -70,-39 71,40
"0805-REVISADO O"#3 [mil]
  rect 40x60 smd: 1(39,0) 2(-40,0)
  silkscreen extent -71,-39 71,39
"0805-REVISADO O"#4 [mil]
  rect 60x40 smd: 1(0,40) 2(0,-39)
  silkscreen extent -39,-70 39,71
"0805-REVISADO O"#5 [mil]
  rect 60x40 smd: 1(0,-40) 2(0,39)
  silkscreen extent -39,-71 40,70
"0805-REVISADO O"#6 [mil]
  rect 40x60 smd: 1(40,0) 2(-39,0)
  silkscreen extent -70,-39 71,40
"0805-REVISADO O"#7 [mil]
  rect 60x40 smd: 1(0,-39) 2(0,39)
  silkscreen extent -39,-71 40,71
"0805-REVISADO O"#8 [mil]
  rect 40x60 smd: 1(-39,0) 2(39,0)
  silkscreen extent -71,-39 71,40
"0805-REVISADO O"#9 [mil]
  rect 40x60 smd: 1(39,0) 2(-39,0)
  silkscreen extent -71,-39 71,40
"0805-REVISADO O"#10 [mil]
  rect 60x40 smd: 1(0,39) 2(0,-40)
  silkscreen extent -39,-71 40,71
"0805-REVISADO O"#11 [mil]
  rect 60x40 smd: 1(0,39) 2(0,-39)
  silkscreen extent -40,-71 39,71
"0805-REVISADO O"#12 [mil]
  rect 40x60 smd: 1(-40,0) 2(39,0)
  silkscreen extent -71,-39 70,40
"1206-REVISADO O"#1 [mil]
  rect 78x60 smd: 1(0,-63) 2(0,62)
  silkscreen extent -52,-107 51,106
"1206-REVISADO O"#2 [mil]
  rect 78x60 smd: 1(0,-62) 2(0,63)
  silkscreen extent -51,-106 51,107
"1206-REVISADO O"#3 [mil]
  rect 60x78 smd: 1(63,0) 2(-62,0)
  silkscreen extent -106,-52 107,51
"1206-REVISADO O"#4 [mil]
  rect 58x78 smd: 1(-63,0) 2(62,0)
  silkscreen extent -107,-52 106,51
"1206-REVISADO O"#5 [mil]
  rect 78x60 smd: 1(0,63) 2(0,-62)
  silkscreen extent -52,-106 51,107
"1206-REVISADO O"#6 [mil]
  rect 78x58 smd: 1(0,62)
  rect 78x60 smd: 2(0,-63)
  silkscreen extent -52,-107 51,106
"1206-REVISADO O"#7 [mil]
  rect 78x60 smd: 1(0,-63) 2(0,63)
  silkscreen extent -51,-106 51,106
"1206-REVISADO O"#8 [mil]
  rect 78x58 smd: 1(0,63) 2(0,-63)
  silkscreen extent -51,-106 51,106
"1206-REVISADO O"#9 [mil]
  rect 60x78 smd: 1(-63,0) 2(62,0)
  silkscreen extent -107,-52 106,51
"2512 - REVISADO" [mil]
  rect 98x156 smd: 1(-275,0) 2(0,0)
  silkscreen extent -354,-98 79,99
ALMEIDA [mil]
  silkscreen extent -585,-97 597,115
BARRA_3P [mil]
  round 72 hole 44: 1(0,100) 2(0,0) 3(0,-100)
  silkscreen extent -50,-150 50,150
"CAP 10X5" [mil]
  rect 80x80 hole 44: 1(0,0)
  round 80 hole 44: 2(-196,0)
  silkscreen extent -294,-196 98,196
"CAP POL 8X12MM"#1 [mil]
  rect 78x78 hole 32: 1(0,0)
  round 78 hole 32: 2(0,-137)
  silkscreen extent -157,-231 157,83
"CAP POL 8X12MM"#2 [mil]
  rect 78x78 hole 32: 1(0,0)
  round 78 hole 32: 2(138,0)
  silkscreen extent -82,-157 232,157
CHAVE_A06#1 [mil]
  round 70 hole 44: 1(-89,-128) 2(88,-128) 3(-89,128) 4(88,128)
  silkscreen extent -89,-128 88,128
CHAVE_A06#2 [mil]
  round 70 hole 44: 1(-88,-128) 2(89,-128) 3(-88,128) 4(89,128)
  silkscreen extent -88,-128 89,128
CHAVE_A06#3 [mil]
  round 70 hole 44: 1(-89,-128) 2(89,-128) 3(-89,128) 4(89,128)
  silkscreen extent -89,-128 89,128
CHAVE_A06#4 [mil]
  round 78 hole 44: 1(-89,-128) 2(89,-128) 3(-89,128) 4(89,128)
  silkscreen extent -89,-128 89,128
"CRISTAL TH3" [mil]
  round 60 hole 32: 1(0,0) 2(0,100)
  Top Layer, Top region: -50,-50 -50,150 -400,150 -400,-50
  silkscreen extent -386,-12 -44,106
"DB9-FÊMEA MONTA_DB9-FÊMEA_MONTAGEM_EM_PCI_180(Primary)" [mil]
  rect 70x70 hole 48: 1(436,0)
  round 70 hole 48: 2(327,0) 3(218,0) 4(109,0) 5(0,0) 6(381,-110) 7(272,-110) 8(163,-110) 9(54,-110)
  round 200 hole 124: _1(711,-57) A2(-275,-57)
  silkscreen extent -375,-300 815,189
DO-214AA#1 [mil]
  rect 90x84 smd: 1(0,82) 2(0,-83)
  silkscreen extent -67,-91 66,90
DO-214AA#2 [mil]
  rect 84x90 smd: 1(82,0) 2(-83,0)
  silkscreen extent -91,-67 90,66
DO-214AA#3 [mil]
  rect 90x84 smd: 1(0,-82) 2(0,83)
  silkscreen extent -67,-90 66,91
DO-214AB#1 [mil]
  rect 148x110 smd: 1(0,140) 2(0,-139)
  silkscreen extent -118,-157 119,158
DO-214AB#2 [mil]
  rect 149x110 smd: 1(0,-140) 2(0,139)
  silkscreen extent -118,-158 119,157
DO-214AB#3 [mil]
  rect 110x149 smd: 1(140,0) 2(-139,0)
  silkscreen extent -157,-118 158,119
"DPAK REVISADO O"#1 [mil]
  rect 78x118 smd: 1(0,0) 3(181,0)
  rect 236x314 smd: 2(90,283)
  silkscreen extent -44,-74 228,111
"DPAK REVISADO O"#2 [mil]
  rect 78x118 smd: 1(0,0) 3(-181,0)
  rect 236x314 smd: 2(-90,-283)
  silkscreen extent -228,-111 44,74
FIDUCIAL' [mil]
  Top Layer, Top lines w12: -30,0 30,0 ; 0,-30 0,30
HC49USM [mil]
  rect 236x118 smd: 1(178,0) 2(-177,0)
  silkscreen extent -255,-98 256,99
IDCSC-10 [mil]
  rect 60x80 hole 44: 1(-200,-50)
  oval 60x80 hole 44: 2(-200,50) 3(-100,-50) 4(-100,50) 5(0,-50) 6(0,50) 7(100,-50) 8(100,50) 9(200,-50) 10(200,50)
  silkscreen extent -400,-176 400,175
IDCSC-20 [mil]
  rect 74x78 hole 44: 1(0,0)
  oval 60x78 hole 44: 2(0,-100) 3(-100,0) 4(-100,-100) 5(-200,0) 6(-200,-100) 7(-300,0) 8(-300,-100) 9(-400,0) 10(-400,-100) 11(-500,0) 12(-500,-100) 13(-600,0) 14(-600,-100) 15(-700,0) 16(-700,-100) 17(-800,0) 18(-800,-100) 19(-900,0) 20(-900,-100)
  silkscreen extent -1100,-225 200,125
IND_MBH10145C [mil]
  rect 124x100 smd: 1(0,-162) 2(0,162)
  silkscreen extent -212,-212 212,212
"INDUTOR 47MH" [mil]
  round 100 hole 48: 1(0,0) 2(276,0)
  silkscreen extent -79,-217 355,217
"INDUTOR B82479A" [mil]
  rect 114x156 smd: 1(-304,0) 2(303,0)
  silkscreen extent -380,-300 380,300
JUMPER100 [mil]
  oval 70x80 hole 44: 1(0,0) 2(-100,0)
  silkscreen extent -150,-50 50,50
"LED 1206" [mil]
  rect 60x78 smd: 1(-63,0) 2(62,0)
  silkscreen extent -103,-51 140,52
"LQFP-100 PASTA" [mil]
  rect 92x11 smd: 1(0,0) 2(0,-20) 3(0,-40) 4(0,-60) 5(0,-79) 6(0,-99) 7(0,-119) 8(0,-138) 9(0,-158) 10(0,-178) 11(0,-197) 12(0,-217) 13(0,-237) 14(0,-256) 15(0,-276) 16(0,-296) 17(0,-315) 18(0,-335) 19(0,-355) 20(0,-375) 21(0,-394) 22(0,-414) 23(0,-434) 24(0,-453) 25(0,-473) 51(588,-473) 52(588,-453) 53(588,-434) 54(588,-414) 55(588,-394) 56(588,-375) 57(588,-355) 58(588,-335) 59(588,-315) 60(588,-296) 61(588,-276) 62(588,-256) 63(588,-237) 64(588,-217) 65(588,-197) 66(588,-178) 67(588,-158) 68(588,-138) 69(588,-119) 70(588,-99) 71(588,-79) 72(588,-60) 73(588,-40) 74(588,-20) 75(588,0)
  rect 11x92 smd: 26(58,-531) 27(77,-531) 28(97,-531) 29(117,-531) 30(136,-531) 31(156,-531) 32(176,-531) 33(195,-531) 34(215,-531) 35(235,-531) 36(254,-531) 37(274,-531) 38(294,-531) 39(313,-531) 40(333,-531) 41(353,-531) 42(373,-531) 43(392,-531) 44(412,-531) 45(432,-531) 46(451,-531) 47(471,-531) 48(491,-531) 49(510,-531) 50(530,-531) 76(530,58) 77(510,58) 78(491,58) 79(471,58) 80(451,58) 81(432,58) 82(412,58) 83(392,58) 84(373,58) 85(353,58) 86(333,58) 87(313,58) 88(294,58) 89(274,58) 90(254,58) 91(235,58) 92(215,58) 93(195,58) 94(176,58) 95(156,58) 96(136,58) 97(117,58) 98(97,58) 99(77,58) 100(58,58)
  silkscreen extent 0,-469 526,65
MFPL-02#1 [mil]
  rect 110x110 hole 70: 1(0,-109)
  round 110 hole 70: 2(0,108)
  silkscreen extent -121,-709 120,-200
MFPL-02#2 [mil]
  rect 110x110 hole 70: 1(0,109)
  round 110 hole 70: 2(0,-108)
  silkscreen extent -120,200 121,709
MFPL-04#1 [mil]
  rect 110x110 hole 70: 1(-83,109)
  round 110 hole 70: 2(82,109) 3(-83,-108) 4(82,-108)
  silkscreen extent -203,200 202,709
MFPL-04#2 [mil]
  rect 110x110 hole 70: 1(82,-109)
  round 110 hole 70: 2(-83,-109) 3(82,108) 4(-83,108)
  silkscreen extent -203,-709 202,-200
MFPL-06#1 [mil]
  rect 110x110 hole 70: 1(-166,109)
  round 110 hole 70: 2(0,109) 3(165,109) 4(-166,-108) 5(0,-108) 6(165,-108)
  silkscreen extent -286,200 285,709
MFPL-06#2 [mil]
  rect 110x110 hole 70: 1(-165,109)
  round 110 hole 70: 2(0,109) 3(166,109) 4(-165,-108) 5(0,-108) 6(166,-108)
  silkscreen extent -285,200 286,709
MFPL-10#1 [mil]
  rect 110x110 hole 70: 1(-330,109)
  round 110 hole 70: 2(-165,109) 3(0,109) 4(166,109) 5(331,109) 6(-330,-108) 7(-165,-108) 8(0,-108) 9(166,-108) 10(331,-108)
  silkscreen extent -450,200 451,709
MFPL-10#2 [mil]
  rect 110x110 hole 70: 1(-331,109)
  round 110 hole 70: 2(-166,109) 3(0,109) 4(165,109) 5(330,109) 6(-331,-108) 7(-166,-108) 8(0,-108) 9(165,-108) 10(330,-108)
  silkscreen extent -451,200 450,709
MINIMLEF/SOD80#1 [mil]
  rect 78x60 smd: 1(0,0) 2(0,158)
  silkscreen extent -51,-39 52,209
MINIMLEF/SOD80#2 [mil]
  rect 60x78 smd: 1(0,0) 2(157,0)
  silkscreen extent -40,-51 208,52
MINIMLEF/SOD80#3 [mil]
  rect 78x60 smd: 1(0,0) 2(0,-157)
  silkscreen extent -52,-208 51,40
MINIMLEF/SOD80#4 [mil]
  rect 78x58 smd: 1(0,0) 2(0,-157)
  silkscreen extent -52,-208 51,40
PHMC4-04 [mil]
  rect 60x60 hole 32: 1(0,0)
  round 60 hole 32: 2(79,0) 3(158,0) 4(236,0)
  silkscreen extent -78,-115 315,71
SD_47219_MOLEX_SD_47219_MOLEX(Primary) [mil]
  rect 64x32 smd: 1(-70,-127) 2(-70,-84) 3(-70,-40) 4(-70,3) 5(-70,46) 6(-70,89) 7(-70,133) 8(-70,176)
  rect 80x58 smd: g1(-172,-271) g2(155,-271) g3(155,270) g4(-172,270)
  Multi-Layer keep-out region: -112,-148 -111.9,-148.98 -111.62,-149.91 -111.16,-150.78 -110.54,-151.54 -109.78,-152.16 -108.91,-152.62 -107.98,-152.9 -107,-153 -106.02,-152.9 -105.09,-152.62 -104.22,-152.16 -103.46,-151.54 -102.84,-150.78 -102.38,-149.91 -102.1,-148.98 -102,-148 -102,-106 -102.1,-105.02 -102.38,-104.09 -102.84,-103.22 -103.46,-102.46 -104.22,-101.84 -105.09,-101.38 -106.02,-101.1 -107,-101 -107.98,-101.1 -108.91,-101.38 -109.78,-101.84 -110.54,-102.46 -111.16,-103.22 -111.62,-104.09 -111.9,-105.02 -112,-106
  Multi-Layer keep-out region: -107,-101 -107.98,-101.1 -108.91,-101.38 -109.78,-101.84 -110.54,-102.46 -111.16,-103.22 -111.62,-104.09 -111.9,-105.02 -112,-106 -111.9,-106.98 -111.62,-107.91 -111.16,-108.78 -110.54,-109.54 -109.78,-110.16 -108.91,-110.62 -107.98,-110.9 -107,-111 -33,-111 -32.02,-110.9 -31.09,-110.62 -30.22,-110.16 -29.46,-109.54 -28.84,-108.78 -28.38,-107.91 -28.1,-106.98 -28,-106 -28.1,-105.02 -28.38,-104.09 -28.84,-103.22 -29.46,-102.46 -30.22,-101.84 -31.09,-101.38 -32.02,-101.1 -33,-101
  Multi-Layer keep-out region: -38,-148 -37.9,-148.98 -37.62,-149.91 -37.16,-150.78 -36.54,-151.54 -35.78,-152.16 -34.91,-152.62 -33.98,-152.9 -33,-153 -32.02,-152.9 -31.09,-152.62 -30.22,-152.16 -29.46,-151.54 -28.84,-150.78 -28.38,-149.91 -28.1,-148.98 -28,-148 -28,-106 -28.1,-105.02 -28.38,-104.09 -28.84,-103.22 -29.46,-102.46 -30.22,-101.84 -31.09,-101.38 -32.02,-101.1 -33,-101 -33.98,-101.1 -34.91,-101.38 -35.78,-101.84 -36.54,-102.46 -37.16,-103.22 -37.62,-104.09 -37.9,-105.02 -38,-106
  Multi-Layer keep-out region: -107,-143 -107.98,-143.1 -108.91,-143.38 -109.78,-143.84 -110.54,-144.46 -111.16,-145.22 -111.62,-146.09 -111.9,-147.02 -112,-148 -111.9,-148.98 -111.62,-149.91 -111.16,-150.78 -110.54,-151.54 -109.78,-152.16 -108.91,-152.62 -107.98,-152.9 -107,-153 -33,-153 -32.02,-152.9 -31.09,-152.62 -30.22,-152.16 -29.46,-151.54 -28.84,-150.78 -28.38,-149.91 -28.1,-148.98 -28,-148 -28.1,-147.02 -28.38,-146.09 -28.84,-145.22 -29.46,-144.46 -30.22,-143.84 -31.09,-143.38 -32.02,-143.1 -33,-143
  Multi-Layer keep-out region: -112,155 -111.9,154.02 -111.62,153.09 -111.16,152.22 -110.54,151.46 -109.78,150.84 -108.91,150.38 -107.98,150.1 -107,150 -106.02,150.1 -105.09,150.38 -104.22,150.84 -103.46,151.46 -102.84,152.22 -102.38,153.09 -102.1,154.02 -102,155 -102,197 -102.1,197.98 -102.38,198.91 -102.84,199.78 -103.46,200.54 -104.22,201.16 -105.09,201.62 -106.02,201.9 -107,202 -107.98,201.9 -108.91,201.62 -109.78,201.16 -110.54,200.54 -111.16,199.78 -111.62,198.91 -111.9,197.98 -112,197
  Multi-Layer keep-out region: -107,202 -107.98,201.9 -108.91,201.62 -109.78,201.16 -110.54,200.54 -111.16,199.78 -111.62,198.91 -111.9,197.98 -112,197 -111.9,196.02 -111.62,195.09 -111.16,194.22 -110.54,193.46 -109.78,192.84 -108.91,192.38 -107.98,192.1 -107,192 -33,192 -32.02,192.1 -31.09,192.38 -30.22,192.84 -29.46,193.46 -28.84,194.22 -28.38,195.09 -28.1,196.02 -28,197 -28.1,197.98 -28.38,198.91 -28.84,199.78 -29.46,200.54 -30.22,201.16 -31.09,201.62 -32.02,201.9 -33,202
  Multi-Layer keep-out region: -38,155 -37.9,154.02 -37.62,153.09 -37.16,152.22 -36.54,151.46 -35.78,150.84 -34.91,150.38 -33.98,150.1 -33,150 -32.02,150.1 -31.09,150.38 -30.22,150.84 -29.46,151.46 -28.84,152.22 -28.38,153.09 -28.1,154.02 -28,155 -28,197 -28.1,197.98 -28.38,198.91 -28.84,199.78 -29.46,200.54 -30.22,201.16 -31.09,201.62 -32.02,201.9 -33,202 -33.98,201.9 -34.91,201.62 -35.78,201.16 -36.54,200.54 -37.16,199.78 -37.62,198.91 -37.9,197.98 -38,197
  Multi-Layer keep-out region: -107,160 -107.98,159.9 -108.91,159.62 -109.78,159.16 -110.54,158.54 -111.16,157.78 -111.62,156.91 -111.9,155.98 -112,155 -111.9,154.02 -111.62,153.09 -111.16,152.22 -110.54,151.46 -109.78,150.84 -108.91,150.38 -107.98,150.1 -107,150 -33,150 -32.02,150.1 -31.09,150.38 -30.22,150.84 -29.46,151.46 -28.84,152.22 -28.38,153.09 -28.1,154.02 -28,155 -28.1,155.98 -28.38,156.91 -28.84,157.78 -29.46,158.54 -30.22,159.16 -31.09,159.62 -32.02,159.9 -33,160
  silkscreen extent -300,-268 300,268
SMA#1 [mil]
  rect 78x78 smd: 1(-75,0) 2(81,0)
  silkscreen extent -63,-74 62,76
SMA#2 [mil]
  rect 78x78 smd: 1(0,-75) 2(0,81)
  silkscreen extent -76,-63 74,62
"SMA DIODES" [mil]
  rect 98x70 smd: 1(78,0) 2(-79,0)
  silkscreen extent -99,-60 98,59
SO8#1 [mil]
  rect 26x76 smd: 1(0,0) 2(50,0) 3(100,0) 4(150,0) 5(150,200) 6(100,200) 7(50,200) 8(0,200)
  silkscreen extent -25,50 175,150
SO8#2 [mil]
  rect 26x80 smd: 1(-75,-110) 2(-25,-110) 3(25,-110) 4(75,-110) 5(75,110) 6(25,110) 7(-25,110) 8(-75,110)
  silkscreen extent -125,-185 -100,-160
SO16 [mil]
  rect 20x76 smd: 1(0,0) 2(50,0) 3(100,0) 4(150,0) 5(200,0) 6(250,0) 7(300,0) 8(350,0) 9(350,200) 10(300,200) 11(250,200) 12(200,200) 13(150,200) 14(100,200) 15(50,200) 16(0,200)
  silkscreen extent -25,50 375,150
"SOIC 16 PINOS"#1 [mil]
  rect 30x86 smd: 1(175,94) 2(125,94) 3(75,94) 4(25,94) 5(-25,94) 6(-75,94) 7(-125,94) 8(-175,94) 9(-175,-126) 10(-125,-126) 11(-75,-126) 12(-25,-126) 13(25,-126) 14(75,-126) 15(125,-126) 16(175,-126)
  silkscreen extent -197,-70 212,98
"SOIC 16 PINOS"#2 [mil]
  rect 30x86 smd: 1(-175,-94) 2(-125,-94) 3(-75,-94) 4(-25,-94) 5(25,-94) 6(75,-94) 7(125,-94) 8(175,-94) 9(175,126) 10(125,126) 11(75,126) 12(25,126) 13(-25,126) 14(-75,126) 15(-125,126) 16(-175,126)
  silkscreen extent -212,-98 197,70
"SOIC 16 PINOS"#3 [mil]
  rect 22x86 smd: 1(-175,-95) 2(-125,-95) 3(-75,-95) 4(-25,-95) 5(25,-95) 6(75,-95) 7(125,-95) 8(175,-95) 9(175,125) 10(125,125) 11(75,125) 12(25,125) 13(-25,125) 14(-75,125) 15(-125,125) 16(-175,125)
  silkscreen extent -213,-99 196,70
"SOIC LARGO ATME" [mil]
  rect 22x78 smd: 1(0,0) 2(50,0) 3(100,0) 4(150,0) 5(150,300) 6(100,300) 7(50,300) 8(0,300)
  silkscreen extent -80,-20 200,240
SOIC-20 [mil]
  rect 27x118 smd: 1(0,0) 2(50,0) 3(100,0) 4(150,0) 5(200,0) 6(250,0) 7(300,0) 8(350,0) 9(400,0) 10(450,0) 11(450,350) 12(400,350) 13(350,350) 14(300,350) 15(250,350) 16(200,350) 17(150,350) 18(100,350) 19(50,350) 20(0,350)
  silkscreen extent -40,-115 490,270
SOL32 [mil]
  rect 26x80 smd: 1(375,200) 2(325,200) 3(275,200) 4(225,200) 5(175,200) 6(125,200) 7(75,200) 8(25,200) 9(-25,200) 10(-75,200) 11(-125,200) 12(-175,200) 13(-225,200) 14(-275,200) 15(-325,200) 16(-375,200) 17(-375,-200) 18(-325,-200) 19(-275,-200) 20(-225,-200) 21(-175,-200) 22(-125,-200) 23(-75,-200) 24(-25,-200) 25(25,-200) 26(75,-200) 27(125,-200) 28(175,-200) 29(225,-200) 30(275,-200) 31(325,-200) 32(375,-200)
  silkscreen extent 400,250 425,275
"SOT23 - REVISAD"#1 [mil]
  rect 44x54 smd: 1(0,0) 2(-74,0) 3(-37,-102)
  silkscreen extent -98,-70 20,-43
"SOT23 - REVISAD"#2 [mil]
  rect 42x54 smd: 1(0,0) 2(75,0) 3(38,103)
  silkscreen extent -19,44 99,71
"SOT23 - REVISAD"#3 [mil]
  rect 42x54 smd: 1(0,0) 2(74,0) 3(37,103)
  silkscreen extent -20,44 98,71
"SOT23 - REVISAD"#4 [mil]
  rect 54x42 smd: 1(0,0) 2(0,74) 3(-103,37)
  silkscreen extent -71,-20 -44,98
"SOT23 - REVISAD"#5 [mil]
  rect 54x42 smd: 1(0,0) 2(0,-75) 3(102,-38)
  silkscreen extent 43,-99 70,19
"SOT23 - REVISAD"#6 [mil]
  rect 54x44 smd: 1(0,0) 2(0,-74) 3(102,-37)
  silkscreen extent 43,-98 70,20
"SOT23 - REVISAD"#7 [mil]
  rect 54x44 smd: 1(0,0) 2(0,-75) 3(102,-38)
  silkscreen extent 43,-99 70,19
"SOT23 - REVISAD"#8 [mil]
  rect 54x42 smd: 1(0,0) 2(0,75) 3(-102,38)
  silkscreen extent -70,-19 -43,99
"SOT23 - REVISAD"#9 [mil]
  rect 42x54 smd: 1(0,0) 2(74,0) 3(37,102)
  silkscreen extent -20,43 98,70
"SOT23 - REVISAD"#10 [mil]
  rect 54x42 smd: 1(0,0) 2(0,-74) 3(102,-37)
  silkscreen extent 43,-98 70,20
"SOT23 - REVISAD"#11 [mil]
  rect 42x54 smd: 1(0,0) 2(75,0) 3(38,102)
  silkscreen extent -19,43 99,70
"SOT23 - REVISAD"#12 [mil]
  rect 44x54 smd: 1(0,0) 2(75,0) 3(38,102)
  silkscreen extent -19,43 99,70
"SOT23 - REVISAD"#13 [mil]
  rect 44x54 smd: 1(0,0) 2(-75,0) 3(-38,-102)
  silkscreen extent -99,-70 19,-43
"SOT23 - REVISAD"#14 [mil]
  rect 54x44 smd: 1(0,0) 2(0,75) 3(-102,38)
  silkscreen extent -70,-19 -43,99
"SOT23 - REVISAD"#15 [mil]
  rect 44x54 smd: 1(0,0) 2(74,0) 3(37,102)
  silkscreen extent -20,43 98,70
SOT223 [mil]
  rect 100x70 smd: 1(125,-87) 3(125,87)
  rect 100x60 smd: 2(125,0)
  Top Layer, Top region: -85,-80 -85,80 -165,80 -165,-80
  silkscreen extent -75,-125 60,125
SSOP28 [mil]
  rect 14x64 smd: 1(0,0) 2(26,0) 3(51,0) 4(77,0) 5(102,0) 6(128,0) 7(154,0) 8(179,0) 9(205,0) 10(230,0) 11(256,0) 12(281,0) 13(307,0) 14(332,0) 15(332,276) 16(307,276) 17(281,276) 18(256,276) 19(230,276) 20(205,276) 21(179,276) 22(154,276) 23(128,276) 24(102,276) 25(77,276) 26(51,276) 27(26,276) 28(0,276)
  silkscreen extent -40,-30 -15,-5
"SUPORTE PILHA C" [mil]
  round 78 hole 48: 1(0,0) 2(0,787)
  silkscreen extent -448,-88 448,999
"TANTALO VISHAY"#1 [mil]
  rect 78x110 smd: 1(-119,0) 2(118,0)
  silkscreen extent -138,-83 137,82
"TANTALO VISHAY"#2 [mil]
  rect 78x110 smd: 1(118,0) 2(-119,0)
  silkscreen extent -138,-83 137,82
"TO220-3 EM PÉ"#1 [mil]
  oval 110x70 hole 60: 1(0,0) 2(0,100) 3(0,200)
  silkscreen extent -100,-100 75,300
"TO220-3 EM PÉ"#2 [mil]
  oval 110x70 hole 60: 1(0,0) 2(0,-100) 3(0,-200)
  silkscreen extent -75,-300 100,100
TO-263-5 [mil]
  rect 156x46 smd: 1(4,133) 2(4,66) 3(4,0) 4(4,-67) 5(4,-134)
  Top Layer, Top region: 600,-210 690,-210 690,210
  Top Layer, Top region: 600,210 600,-210 690,-210 690,210
  Top Layer, Top region: 300,175 300,-175 600,-175 600,175
  silkscreen extent 90,-220 592,220
TO-263_3 [mil]
  rect 50x100 smd: 1(100,0) 2(0,0) 3(-100,0)
  Top Layer, Top region: 212,-120 -211,-120 -211,-610 212,-610
  Top Layer, Top lines w50: 0,-142 0,1
  silkscreen extent -225,-462 225,-60
TOMADA_NMJ6HCD2_TOMADA_NMJ6HCD2(Primary) [mil]
  round 100 hole 60: 1(319,657) 1n(-319,657) 2(319,407) 2n(-319,407) 3(319,157) 3n(-319,157)
  silkscreen extent -359,-118 358,926
"TRIMPOT 3386" [mil]
  round 60 hole 32: 1(0,0) 2(-200,100) 3(0,200)
  silkscreen extent -250,-50 50,250
USB_B_FCI10118'_USB_B_FCI10118'(Primary) [mil]
  rect 54x16 smd: 1(106,51) 2(106,26) 3(106,0) 4(106,-26) 5(106,-51)
  oval 48x50 hole 24: 6(106,-98) 9(106,98)
  oval 64x48 hole 24: 7(0,-138) 8(0,138)
  rect 60x60 smd: g5(0,40) g6(0,-40)
  Top Layer, Top region: -30,-90 -30,-138 30,-138 30,-90
  Top Layer, Top region: 29,90 29,138 -30,138 -30,90
  Keep-Out Layer, Board lines w8: -57,-150 -57,150
  silkscreen extent -85,-163 117,163
WH1602B_DS_WH1602B_DS(Primary) [mil]
  oval 70x98 hole 44: 1(49,-831) 2(-51,-831) 3(-151,-831) 4(-251,-831) 5(-351,-831) 6(-451,-831) 7(-551,-831) 8(-651,-831) 9(-751,-831) 10(-851,-831) 11(-951,-831) 12(-1051,-831) 13(-1151,-831) 14(-1251,-831) 15(249,-831) 16(149,-831)
  round 118 hole 117: _1(-1555,646) _2(1556,646) _3(1497,-772) A4(-1496,-772)
  silkscreen extent -1653,-929 1654,803

## Free pads (board coordinates)
  round 158 hole 157: 0(4695,6470) 0(4695,10604) 0(8750,6470) 0(8750,10604) 0(12805,6471) 0(12805,10604)
  round 60 hole 32: 0(7110,7770)

## Via types
v1: diameter 28, hole 16, Top Layer, Top to Bottom Layer, Bottom, 610 vias
v2: diameter 36, hole 24, Top Layer, Top to Bottom Layer, Bottom, 4 vias
v3: diameter 40, hole 24, Top Layer, Top to Bottom Layer, Bottom, 4 vias

## Nets (pads, with @x,y where several pads share a name; then routed paths per layer and width w, separated by ;. In a path a pad name is that pad's centre, name@x,y a point inside that pad or via, vN(x,y) a via of type N, cw(c..) or ccw(c..) an arc to the next point about the centre after c; other vN are vias at no path point)
3,3V: C7.2 C15.2 C16.2 C17.2 C18.2 C24.2 C25.2 C27.2 C31.2 C35.2 C40.1 C41.2 C74.2 D2.2 D3.2 D4.2 D5.2 D8.2 D9.2 D11.2 D13.2 D14.2 D15.2 D19.2 D20.1 D24.2 D26.2 D28.2 D30.2 D32.2 D34.2 D35.2 D36.2 D37.2 D38.2 D40.2 D46.2 D47.2 D48.2 J12.1 J12.2 J17.4 R4.1 R5.1 R6.1 R7.2 R20.2 R22.2 R25.1 R26.1 R27.1 R28.1 R40.2 R41.2 R44.1 R45.1 R46.1 R47.1 R48.2 R63.2 R64.2 R65.1 R72.2 R73.2 R76.2 R78.2 R89.2 R90.2 R105.2 R131.2 R133.2 U2.10 U2.16 U4.28 U4.42 U4.54 U4.71 U4.84 U4.96 U6.16 U8.3 U8.7 U8.8 U9.3 U14.3 U14.5 U14.6
3,3VA: C56.1 C57.2 D7.2 D45.2 R16.2 R132.2 U4.10 U4.12 U11.2
5V: C23.2 C36.1 C37.2 C51.2 C72.2 D22.2 J4.4 J7.1 L3'.1 L3.1 L4.1 LCD1.2 Q13.3 R29.1 R33.1 R57.2 R58.2 R80.1 R93.1 R95.2 R130.2 U5.1 U5.20 U7.4 U9.1 U10.16 U13.4 U13.20
5VA: C4.2 R80.2 U1.8
12V: C67.1 C68.2 C69.2 J3.1 J4.1 J5.1 J6.1 J8.1 J9.1 J11.1 J13.2 J16.1 J18.1 J20.1 J22.1 PSW1.2 PSW6.1 Q11.2 R67.1 R125.1 U12.20 U12.29
12VA: C70.2 R125.2 U12.8
AUDIO: R1.1 U4.6
BOTAO_GRATIS: D40.3 R106.2 U4.27
CH1: D23.2 J13.7
CH2: D27.2 J13.8
CH3: D31.2 J13.9
CH4: D25.2 J13.10
CH5: D29.2 J13.3
CH6: D33.2 J13.4
DEC: R27.2 S3.2 U4.90
DEX_RX_232: J19.2 J19.2n U6.9
DEX_RXD: U6.8 U10.5
DEX_TXD: R121.2 U6.10 U10.14
DEX_TXD_232: J19.1 J19.1n U6.7
ENTER: R28.2 S4.2 U4.89
ESC: R25.2 S1.2 U4.92
FIM_DO_PAPEL: C12.2 D8.3 R19.2 U4.8
FLASH_CE_1: U4.63 U8.1
FLASH_CE_2: U4.57 U14.4
FLASH_SCK: U4.62 U8.6 U14.2
FLASH_SI: U4.60 U8.5 U14.1
FLASH_SO: U4.61 U8.2 U14.8
GND: B1.2 C2.1 C3.1 C4.1 C5.1 C6.1 C7.1 C8.1 C9.2 C10.2 C12.1 C13.1 C14.1 C15.1 C16.1 C17.1 C18.1 C19.1 C20.1 C21.1 C22.1 C23.1 C24.1 C25.1 C27.1 C29.1 C30.1 C31.1 C32.1 C33.1 C34.1 C35.1 C36.2 C37.1 C38.2 C39.1 C40.2 C41.1 C42.1 C43.1 C44.1 C45.1 C46.1 C47.1 C49.1 C50.1 C51.1 C52.2 C53.1 C58.2 C59.1 C61.1 C62.1 C63.1 C64.1 C65.1 C66.1 C67.2 C68.1 C69.1 C70.1 C71.1 C72.1 C74.1 D2.1 D4.1 D5.1 D8.1 D9.1 D11.1 D13.1 D14.1 D15.1 D17.1 D18.1 D19.1 D22.1 D24.1 D26.1 D28.1 D30.1 D32.1 D34.1 D35.1 D36.1 D37.1 D38.1 D40.1 D43.1 D44.1 D46.1 D47.1 D48.1 J2.4 J3.2 J4.2 J4.3 J6.4 J7.2 J8.2 J9.2 J10.5 J11.2 J12.4 J12.6 J12.8 J12.10 J12.12 J12.14 J12.16 J12.18 J12.20 J13.1 J15.2 J15.6 J16.2 J17.6 J17.g1 J17.g2 J17.g3 J17.g4 J18.2 J19.3 J19.3n J20.2 J21.5 J21.6 J21.7 J21.8 J21.9 J23.2 L1.2 L2.2 L5.1 L6.2 L8.2 LCD1.1 LCD1.5 LCD1.16 Q2.3 Q3.3 Q4.3 Q5.2 Q6.2 Q7.3 Q10.2 Q12.2 Q14.2 Q15.2 Q16.3 Q17.2 Q19.2 Q20.3 Q21.3 R33.3 R35.1 R37.2 R39.2 R49.2 R50.2 R51.2 R52.2 R55.2 R56.1 R61.1 R62.1 R71.1 R99.1 R100.1 R108.2 R113.2 R114.2 R117.2 R118.2 R121.1 R122.1 R124.1 R127.1 R129.1 S1.1 S2.1 S3.1 S4.1 S5.1 U1.4 U2.8 U2.13 U3.8 U4.31 U4.41 U4.55 U4.72 U4.83 U4.97 U5.9 U5.10 U5.19 U6.15 U7.3 U7.5 U8.4 U9.2 U10.6 U10.7 U10.8 U12.1 U12.3 U12.7 U12.9 U12.15 U12.16 U12.17 U12.23 U12.26 U12.32 U13.7 U13.18 U13.21 U13.25 U14.7
GNDA: C11.1 C54.2 C55.1 C56.2 C57.1 D7.1 D45.1 L5.2 L7.2 R18.1 U4.11 U4.15 U11.1
H_DIR_EMB: R112.1 U4.21
H_ES_EMB: R111.1 U4.44
HVPREF: R103.1 R104.1 U12.11
INC: R26.2 S2.2 U4.91
INHIBIT: J13.6 R69.1
INHIBIT_P70: R54.2 U4.39
INHIBIT_UCA1: R53.2 U4.38
L_DIR_EMB: R116.1 U4.20